# EAGLE board rj12_adapter (EAGLE 8.5.0)
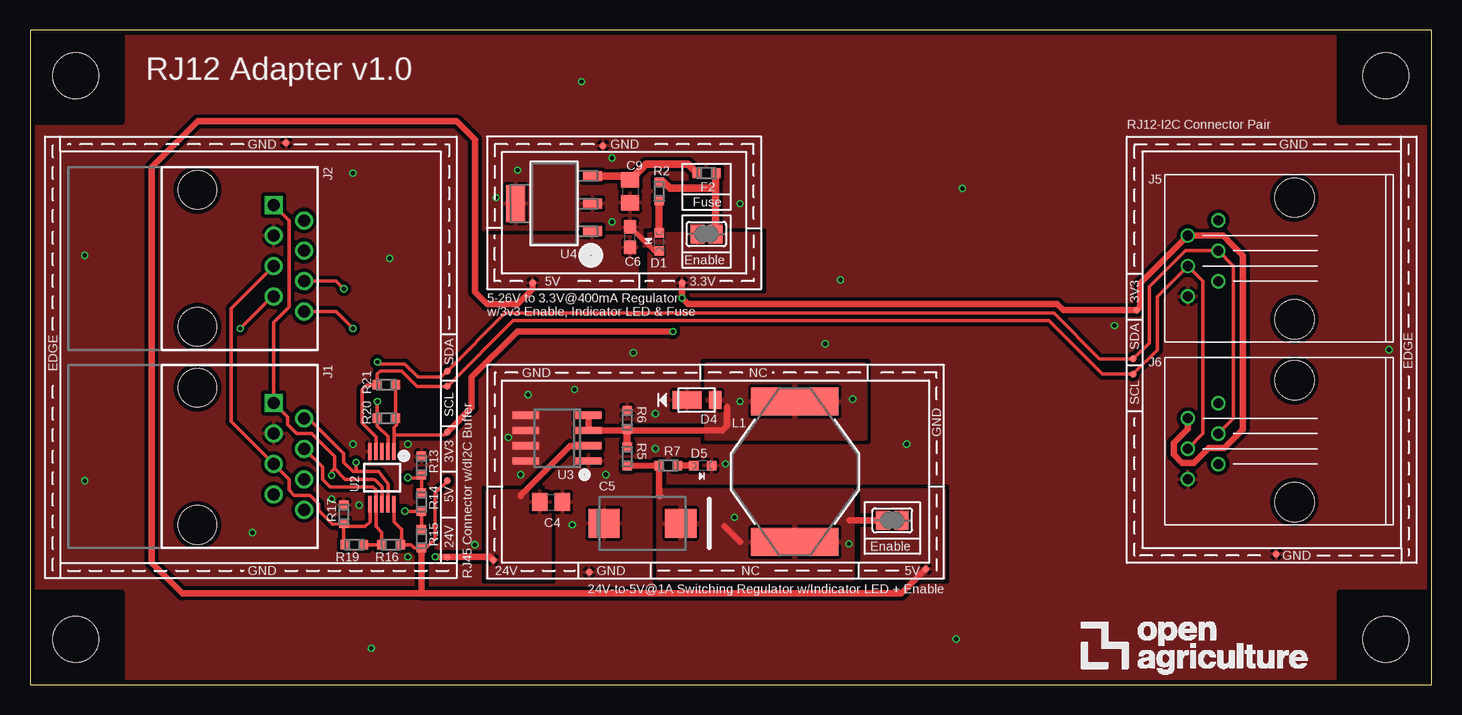
[diagram p0: board, top side]
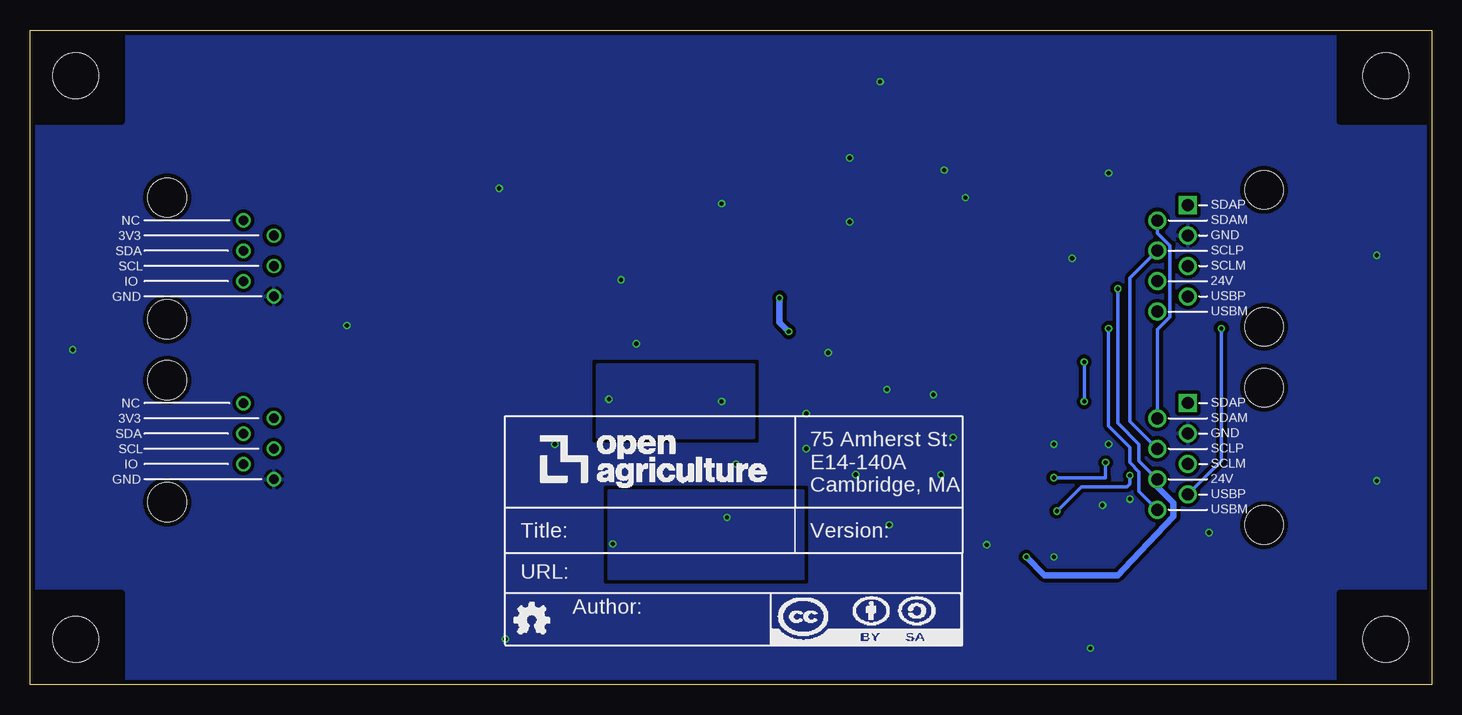
[diagram p1: board, bottom side, seen from below]

Size 116.84 x 54.61 mm. Coordinates in mm from the lower left corner, seen from the top.
Outline: 0,0 116.84,0 116.84,54.61 0,54.61 0,0
Copper layers (1*16): Top 0.035559375mm / dielectric 1.6mm / Bottom 0.035559375mm
Design rules "oshpark-2layer-mask": minimum track width 6mil, minimum drill 10mil, track to track 6mil, track to pad 6mil, pad to pad 6mil, via to via 6mil, smd to smd 6mil, copper to edge 15mil, drill to drill 6mil, minimum pad ring 5mil, minimum via ring 5mil, stop-mask expansion 2.5mil, vias tented up to drill 20mil, thermal gap 10mil

## Footprints (pad centres in the part's own frame; a part is rotated, then mirrored left to right if it is on the bottom)
C0805 = smd 1.3 x 1.5: 1 -0.95,0; 2 0.95,0
CT7343 = smd 2.6 x 2.4: + -3.2,0; - 3.2,0
C0603 = smd 1.1 x 1: 1 -0.85,0; 2 0.85,0
CHIPLED_0603 = smd 0.8 x 0.8: A 0,-0.75; C 0,0.75
POWERDI123 = smd 1.05 x 1.5: + -1.3,0 | smd 2.4 x 1.5: - 1.05,0
0603 = smd 0.756 x 0.8: 1 -0.778,0; 2 0.778,0
OPENAG-V1-RJ45 = drill 1: 24V(6) 1.905,8.89; DSCLM(5) 0.635,6.35; DSCLP(4) -0.635,8.89; DSDAM(2) -3.175,8.89; GND(3) -1.905,6.35; USBM(8) 4.445,8.89; USBP(7) 3.175,6.35 | drill 1 square: DSDAP(1) -4.445,6.35 | hole 3.2: -5.715,0; 5.715,0
OPENAG-I2C-RJ12 = drill 0.8: 1 -8.89,-3.175; 2 -6.35,-1.905; 3 -8.89,-0.635; 4 -6.35,0.635; 5 -8.89,1.905; 6 -6.35,3.175 | hole 3.25: 0,-5.08; 0,5.08
UP2B = smd 2.311 x 7.29: 1 -5.855,0; 2 5.855,0
RC0603N = smd 0.756 x 0.8: 1 -0.778,0; 2 0.778,0
SOLDERJUMPER_REFLOW_NOPASTE = smd 1.168 x 1.6: 1 -0.762,0; 2 0.762,0
TP06R = smd 0.6 x 0.6: TP 0,0
SOP50P490X110-10N = smd 1.4 x 0.3: 1 -2.2,1; 2 -2.2,0.5; 3 -2.2,0; 4 -2.2,-0.5; 5 -2.2,-1; 6 2.2,-1; 7 2.2,-0.5; 8 2.2,0; 9 2.2,0.5; 10 2.2,1
SOIC8 = smd 0.6 x 2.2: 1 -1.905,-2.6; 2 -0.635,-2.6; 3 0.635,-2.6; 4 1.905,-2.6; 5 1.905,2.6; 6 0.635,2.6; 7 -0.635,2.6; 8 -1.905,2.6
MP04A = smd 1.6 x 0.838: 1 -3.2,2.3; 2 -3.2,0; 3 -3.2,-2.3 | smd 1.6 x 3.099: 4 3.2,0
OPENAG-CORNER-MOUNTING-HOLE = hole 3.81: 0,0

## Placement (x,y rotation side)
C4  15uF  [C0805]  43.43,15.24 0 top
C5  220uF  [CT7343]  51.05,13.46 180 top
C6  0.1uF  [C0603]  50.04,37.34 90 top
C9  10uF  [C0805]  50.04,41.15 270 top
D1  APT1608  [CHIPLED_0603]  52.45,36.96 180 top
D4  SBR2A40P1-7  [POWERDI123]  55.82,23.75 180 top
D5  APT1608  [CHIPLED_0603]  56.07,18.29 270 top
F2  400mA  [0603]  56.39,42.67 0 top
FRAME1  [DOCFIELD]  77.22,3.3 0 bottom
J1  54602-908LF  [OPENAG-V1-RJ45]  13.97,19.05 270 top
J2  54602-908LF  [OPENAG-V1-RJ45]  13.97,35.56 270 top
J5  OPENAG-I2C-RJ12  [OPENAG-I2C-RJ12]  105.41,35.56 0 top
J6  OPENAG-I2C-RJ12  [OPENAG-I2C-RJ12]  105.41,20.32 0 top
L1  68uH  [UP2B]  63.75,17.78 270 top
R2  100  [RC0603N]  52.45,41.15 90 top
R5  3.01K  [RC0603N]  49.78,19.05 270 top
R6  976 Ohm  [RC0603N]  49.78,22.1 270 top
R7  100  [RC0603N]  53.21,18.29 180 top
R13  600  [RC0603N]  32.64,18.29 90 top
R14  120  [RC0603N]  32.64,15.24 90 top
R15  600  [RC0603N]  32.64,12.19 90 top
R16  600  [RC0603N]  30.1,11.68 0 top
R17  600  [RC0603N]  26.16,14.22 270 top
R19  120  [RC0603N]  27.05,11.68 0 top
R20  10K  [RC0603N]  29.72,22.23 0 top
R21  10K  [RC0603N]  29.72,25.02 0 top
SJ2  [SOLDERJUMPER_REFLOW_NOPASTE]  71.88,13.72 0 top
SJ3  [SOLDERJUMPER_REFLOW_NOPASTE]  56.39,37.59 180 top
TP4  TPTP06R  [TP06R]  47.75,44.96 180 top
TP5  TPTP06R  [TP06R]  74.68,9.65 180 top
TP6  TPTP06R  [TP06R]  46.61,9.4 180 top
TP7  TPTP06R  [TP06R]  38.61,10.41 180 top
TP8  TPTP06R  [TP06R]  34.8,24.89 0 top
TP9  TPTP06R  [TP06R]  34.8,26.16 0 top
TP11  TPTP06R  [TP06R]  92.27,31.24 0 top
TP12  TPTP06R  [TP06R]  91.95,25.91 0 top
TP13  TPTP06R  [TP06R]  103.89,10.92 0 top
TP14  TPTP06R  [TP06R]  91.95,27.18 0 top
TP29  TPTP06R  [TP06R]  41.91,33.53 180 top
TP30  TPTP06R  [TP06R]  54.36,33.53 180 top
TP32  TPTP06R  [TP06R]  34.8,21.08 0 top
TP33  TPTP06R  [TP06R]  21.34,45.21 0 top
TP34  TPTP06R  [TP06R]  34.8,17.02 0 top
TP35  TPTP06R  [TP06R]  34.8,10.67 0 top
U2  PCA9615  [SOP50P490X110-10N]  29.34,17.27 270 top
U3  MIC4680  [SOIC8]  43.94,20.57 90 top
U4  LM2937  [MP04A]  43.69,40.13 180 top
U$1  [OPENAG-CORNER-MOUNTING-HOLE]  3.81,3.81 0 top
U$2  [OPENAG-CORNER-MOUNTING-HOLE]  3.81,50.8 270 top
U$3  [OPENAG-CORNER-MOUNTING-HOLE]  113.03,3.81 90 top
U$4  [OPENAG-CORNER-MOUNTING-HOLE]  113.03,50.8 180 top
U$5  [OPENAG-LOGO-750-MIL]  87.63,1.27 0 top

## Library data of the parts
C4 = openag-capacitors; MANUFACTURER: TDK Corporation; MPN: C2012X5R1V156M125AC; VENDOR: Digikey; VLINK: https://www.digikey.com/product-detail/en/tdk-corporation/C2012X5R1V156M125AC/445-14423-1-ND/3956089; VPN: 445-14423-1-ND
C5 = openag-capacitors; MANUFACTURER: AVX Corporation; MPN: TPSY227K010R0100; VENDOR: Digikey; VLINK: https://www.digikey.com/product-detail/en/avx-corporation/TPSY227K010R0100/478-5408-1-ND/1967712; VPN: 478-5408-1-ND
C6 = openag-capacitors; MANUFACTURER: Kemet; MPN: C0603C104K5RACTU; VENDOR: Digikey; VLINK: https://www.digikey.com/product-detail/en/kemet/C0603C104K5RACTU/399-5089-1-ND/1465623; VPN: 399-5089-1-ND
C9 = openag-capacitors; MANUFACTURER: Taiyo Yuden; MPN: GMK212BBJ106KG-T; VENDOR: Digikey; VLINK: https://www.digikey.com/product-detail/en/taiyo-yuden/GMK212BBJ106KG-T/587-4893-1-ND/6563736; VPN: 587-4893-1-ND
D1 D5 = openag-diodes; MANUFACTURER: Kingbright; MPN: APT1608CGCK; VENDOR: Digikey; VLINK: https://www.digikey.com/product-detail/en/kingbright/APT1608CGCK/754-1116-1-ND/1747833#; VPN: 754-1116-1-ND
D4 = openag-diodes; MANUFACTURER: Diodes Incorporated; MPN: SBR2A40P1-7; VENDOR: Digikey; VLINK: https://www.digikey.com/product-detail/en/diodes-incorporated/SBR2A40P1-7/SBR2A40P1DITR-ND/1681825; VPN: SBR2A40P1DITR-ND
F2 = openag-fuses; MANUFACTURER: Littlefuse Inc.; MPN: 0448.400MR; VENDOR: Digikey; VLINK: https://www.digikey.com/product-detail/en/littelfuse-inc/0448.400MR/F5573CT-ND/3306934; VPN: F5573CT-ND
FRAME1 = openag-frames; AUTHOR: JR; MPN: N/A; TITLE: RJ12 Adapter; URL: github.com/OpenAgInitiative/openag_eagle/proj/sensor-nodes; VER: 1.0
J1 J2 = openag_connector; POPULATE: YES; VERIFIED: NO
J5 J6 = openag-connectors; MPN: A-2004-1-4-LP-N-R
L1 = openag-inductors; MANUFACTURER: Eaton; MPN: UP2B-680-R; VENDOR: Digikey; VLINK: https://www.digikey.com/product-detail/en/UP2B-680-R/513-1083-1-ND/695364; VPN: 513-1083-1-ND
R2 R7 = openag-resistors; MANUFACTURER: Yageo; MPN: RC0603JR-07100RL; VENDOR: Digikey; VLINK: https://www.digikey.com/product-detail/en/yageo/RC0603JR-07100RL/311-100GRCT-ND/729644; VPN: 311-100GRCT-ND
R5 = openag-resistors; MANUFACTURER: Yageo; MPN: RC0603FR-073K01L; VENDOR: Digikey; VLINK: https://www.digikey.com/product-detail/en/yageo/RC0603FR-073K01L/311-3.01KHRCT-ND/730068; VPN: 311-3.01KHRCT-ND
R6 = openag-resistors; MANUFACTURER: Yageo; MPN: RC0603FR-07976RL; VENDOR: Digikey; VLINK: https://www.digikey.com/product-detail/en/yageo/RC0603FR-07976RL/311-976HRCT-ND/730388; VPN: 311-976HRCT-ND
R13 R15-R17 = openag-resistors; MANUFACTURER: Yageo; MPN: RC0603FR-07604RL; VENDOR: Digikey; VLINK: https://www.digikey.com/product-detail/en/yageo/RC0603FR-07604RL/311-604HRCT-ND/730276; VPN: 311-604HRCT-ND
R14 R19 = openag-resistors; MANUFACTURER: Yageo; MPN: RC0603FR-07120RL; VENDOR: Digikey; VLINK: https://www.digikey.com/product-detail/en/yageo/RC0603FR-07120RL/311-120HRCT-ND/729867; VPN: 311-120HRCT-ND
R20 R21 = openag-resistors; MANUFACTURER: Panasonic; MPN: ERJ-3EKF1002V; VENDOR: Digikey; VLINK: https://www.digikey.com/product-detail/en/panasonic-electronic-components/ERJ-3EKF1002V/P10.0KHCT-ND/198102; VPN: P10.0KHCT-ND
SJ2 SJ3 = openag-connectors; MPN: N/A
TP4-TP9 TP11-TP14 TP29 TP30 TP32-TP35 = openag-testpads; MPN: N/A
U2 = openag-buffers; MANUFACTURER: NXP USA Inc.; MPN: PCA9615DPJ; VENDOR: Digikey; VLINK: https://www.digikey.com/product-detail/en/nxp-usa-inc/PCA9615DPJ/568-11484-1-ND/4864508; VPN: 568-11484-1-ND
U3 = openag-regulators; MANUFACTURER: Microchip Technology; MPN: MIC4680YM-TR; VENDOR: Digikey; VLINK: https://www.digikey.com/product-detail/en/microchip-technology/MIC4680YM-TR/576-1222-1-ND/771874; VPN: 576-1222-1-ND
U4 = openag-regulators; MANUFACTURER: Texas Instruments; MPN: LM2937IMP-3.3/NOPB; VLINK: https://www.digikey.com/product-detail/en/texas-instruments/LM2937IMP-3.3-NOPB/LM2937IMP-3.3-NOPBCT-ND/270742#; VPN: LM2937IMP-3.3/NOPBCT-ND
U$1-U$5 = openag-frames

## Nets
+3V3: J5.5 J6.5 R20.2 R21.2 SJ3.2 TP11.TP TP30.TP TP32.TP U2.1
+5V: C6.1 R15.1 R16.2 SJ2.2 TP5.TP TP29.TP TP34.TP U2.10 U4.1
+24V: C4.1 J1.24V(6) J2.24V(6) TP7.TP TP35.TP U3.2
DSCLM: J1.DSCLM(5) J2.DSCLM(5) R17.2 R19.1 U2.6
DSCLP: J1.DSCLP(4) J2.DSCLP(4) R16.1 R19.2 U2.7
DSDAM: J1.DSDAM(2) J2.DSDAM(2) R13.1 R14.2 U2.9
DSDAP: J1.DSDAP(1) J2.DSDAP(1) R14.1 R15.2 U2.8
GND: C4.2 C5.- C6.2 C9.2 D1.C D4.- D5.C J1.GND(3) J2.GND(3) J5.1 J6.1 R6.1 R13.2 R17.1 TP4.TP TP6.TP TP13.TP TP33.TP U2.5 U3.1 U3.5 U3.6 U3.7 U3.8 U4.2 U4.4
IO: J6.2
N$4: D1.A R2.1
N$5: C9.1 F2.1 U4.3
N$31: D4.+ L1.1 R5.1 R6.2 U3.3 U3.4
N$32: D5.A R7.1
N$33: C5.+ L1.2 R5.2 R7.2 SJ2.1
REG_3V3_400MA: F2.2 R2.2 SJ3.1
SCL: J5.3 J6.3 R21.1 TP8.TP TP12.TP U2.4
SDA: J5.4 J6.4 R20.1 TP9.TP TP14.TP U2.2
USBM: J1.USBM(8) J2.USBM(8)
USBP: J1.USBP(7) J2.USBP(7)

## Tracks (layer width: path | path; a pad name or v marks a point on that pad's centre or on a via)
+3V3  (via drill 0.35)
  Top 0.305: U2.1 30.34,20.83 | 30.34,20.83 30.34,21.45 30.57,21.68 30.57,22.15 R20.2 R21.2 | TP32.TP 34.54,20.83 30.34,20.83
  Top 0.559: TP32.TP 36.83,23.11 36.83,25.65 40.64,29.46 v53.59,29.46 | TP30.TP v54.36,32.26 54.86,31.75 85.62,31.75 86.13,31.24 TP11.TP 92.56,31.53 92.56,33.5 J5.5 99.47,37.47 100.24,36.69 100.24,36.66 101.09,35.81 101.09,21.31 99.55,19.77 98.28,19.77 97.01,18.5 96.03,18.5 95.34,19.19 95.34,20.18 96.52,21.36 J6.5
  Bottom 0.559: v54.36,32.26 54.36,30.23 v53.59,29.46
  pour Top: 51.56,33.02 51.56,37.72 60.96,37.72 60.96,33.02
+5V
  Top 0.305: U2.10 30.34,13.61 30.99,12.95 30.99,11.72 R16.2 31.75,11.68 32.02,11.41 R15.1 33,11.41 33.78,12.19 33.78,16 TP34.TP
  Top 0.559: 32.77,7.62 12.7,7.62 10.16,10.16 10.16,43.18 13.97,46.99 35.56,46.99 37.08,45.47 37.08,32.77 38.1,31.75 40.64,31.75 41.91,33.02 TP29.TP | R15.1 32.64,7.75 32.77,7.62 | TP5.TP 72.64,7.62 32.77,7.62
  pour Top: 50.67,33.02 50.67,37.47 38.1,37.47 38.1,33.02
  pour Top (isolate 0.305): 76.2,16.26 69.34,16.26 69.34,8.89 76.2,8.89
+24V  (via drill 0.35)
  Top 0.305: J2.24V(6) 25.53,33.66 v26.16,33.02
  Top 0.559: v33.78,10.67 TP35.TP 38.35,10.67 TP7.TP | U3.2 45.02,19.94 40.89,15.81 40.89,15.75
  Bottom 0.305: v26.16,33.02 26.16,21.84 24.38,20.07 24.38,18.67 J1.24V(6) 22.86,16.49
  Bottom 0.559: 22.86,16.49 21.53,15.16 21.53,14.03 25.65,9.65 26.16,9.14 32.26,9.14 v33.78,10.67
  pour Top: 38.1,8.89 43.37,8.89 43.37,16.19 38.1,16.19
DSCLM
  Top 0.305: R19.1 26.16,11.72 26.16,13.21 | 26.16,13.21 R17.2 25.23,13.37 24.07,14.54 24.07,15.11 23.36,15.81 22.03,15.81 21.59,16.26 21.59,17.14 J1.DSCLM(5) 16.76,21.97 16.76,31.37 J2.DSCLM(5) | U2.6 28.34,13.61 27.94,13.21 26.16,13.21
DSCLP
  Top 0.305: R19.2 R16.1 29.32,12.72 28.84,13.21 U2.7 28.84,16.25 28.57,16.51 25.02,16.51 24.38,17.14 24.38,18.16 J1.DSCLP(4)
  Bottom 0.305: J2.DSCLP(4) 25.15,33.91 25.15,21.97 J1.DSCLP(4)
DSDAM  (via drill 0.35)
  Top 0.305: 27.18,17.78 29.08,17.78 29.84,16.76 U2.9 | R14.2 R13.1 arc-90 32.47,17.27 v31.5,17.27 31.37,17.27 | v27.18,18.54 27.18,17.78 | 27.18,17.78 26.92,17.78 26.16,18.54 26.16,19.3 23.24,22.23 J1.DSDAM(2)
  Bottom 0.305: v31.5,17.27 27.18,17.27 v27.18,18.54 | J2.DSDAM(2) 22.86,37.69 21.8,36.63 21.8,30.68 22.86,29.62 J1.DSDAM(2)
DSDAP  (via drill 0.35)
  Top 0.305: R15.2 R14.1 31.26,14.46 v31.24,14.48 | 25.4,18.03 26.29,17.14 28.57,17.14 28.75,17.09 29.34,16.51 U2.8 | 25.4,18.03 25.4,19.05 23.5,20.95 22.23,20.95 21.46,21.72 21.46,22.35 J1.DSDAP(1) 20.32,30.23 21.59,31.5 21.59,38.73 J2.DSDAP(1) | 25.4,18.03 25.14,17.78 v25.14,17.46
  Bottom 0.305: v31.24,14.48 29.21,16.51 25.4,16.51 25.14,16.77 v25.14,17.46
GND  (via drill 0.35)
  Top 0.406: D1.C 52.02,36.21 C6.2
  other vias: 26.92,20.07 31.5,20.07 27.43,14.99 25.15,15.49 48.51,38.61 48.01,17.53 40.89,17.53 57.98,18.41 52.13,22.61 41.53,24.19 39.88,20.64 45.4,24.64 73.09,20.07 45.21,13.34 40.64,42.93 38.86,40.64 29.97,35.56 45.97,50.29 77.22,3.81 28.45,3.05 4.57,17.02 4.57,35.81 50.29,27.69 48.51,43.94 59.18,40.13 67.56,33.78 77.72,41.4 26.92,42.67 66.29,28.45 18.54,12.7 31.5,10.67 37.08,11.68 52.13,19.68 113.28,27.94 90.42,29.97
  pour Top (isolate 0.406, rank 3): 60.96,33.02 60.96,45.72 38.1,45.72 38.1,33.02
  pour Top (isolate 0.305, rank 3): 0,0 116.84,0 116.84,54.61 0,54.61
  pour Top (isolate 0.305): 1.27,8.89 35.56,8.89 35.56,45.72 1.27,45.72
  pour Bottom (isolate 0.305): 35.56,8.89 35.56,45.72 1.27,45.72 1.27,8.89
  pour Bottom (isolate 0.305, rank 3): 0,0 116.84,0 116.84,54.61 0,54.61
  pour Top (isolate 0.406, rank 2): 76.2,26.67 38.1,26.67 38.1,8.89 76.2,8.89
  pour Bottom (isolate 0.406, rank 2): 76.2,26.67 38.1,26.67 38.1,8.89 76.2,8.89
  pour Top (isolate 0.305, no thermals): 42.55,18.1 39.81,18.1 39.81,23.18 42.55,23.18
  pour Top (isolate 0.305): 115.57,45.72 115.57,10.16 91.44,10.16 91.44,45.72
N$4
  Top 0.61: D1.A R2.1
N$5
  Top 0.61: 49.86,42.43 C9.1 | C9.1 49.7,42.43 U4.3 | F2.1 54.85,43.43 51.37,43.43 C9.1
N$31  (via drill 0.35)
  Top 0.559: 49.67,21.21 U3.3 U3.4 | 49.67,21.21 R6.2 | 58.1,23.16 58.1,21.59 57.72,21.21 49.67,21.21
  Top 0.61: R5.1 R6.2
  other vias: 59.18,23.62 68.58,23.81
  pour Top (isolate 0.305): 69.6,20.57 69.6,26.67 56.39,26.67 56.39,20.57
  pour Bottom (isolate 0.305): 69.53,26.67 69.53,20.64 56.52,20.64 56.52,26.67
N$32
  Top 0.559: R7.1 D5.A
N$33  (via drill 0.35)
  Top 0.559: 59.2,11.93 57.91,13.21 | SJ2.1 68.33,13.72 | R5.2 R7.2 52.44,15.75 52.58,15.75
  Top 0.61: SJ2.1 71.1,13.7
  other vias: 58.74,13.97 68.26,11.75
  pour Top: 68.58,8.89 68.58,16.19 52.39,16.19 52.39,8.89
  pour Bottom (isolate 0.305): 68.58,8.89 68.58,16.19 52.39,16.19 52.39,8.89
REG_3V3_400MA
  Top 0.61: SJ3.1 57.17,41.4 | 57.17,41.4 F2.2 | R2.2 52.82,41.93 53.34,41.4 57.17,41.4
SCL
  Top 0.305: U2.4 28.84,20.69 27.69,21.84 27.69,24.64 28.07,25.02 R21.1 28.96,25.04 28.96,25.91 29.21,26.16 30.99,26.16 32.26,24.89 TP8.TP 40.28,30.38 84.94,30.38 84.96,30.35 89.41,25.91 TP12.TP 93.98,27.94 93.98,32.38 J5.3 97.79,33.66 97.79,20.95 J6.3
SDA  (via drill 0.35)
  Top 0.305: U2.2 29.84,20.71 28.94,21.61 R20.1 28.94,23.61 v28.96,23.62 | v28.96,26.92 29.11,26.77 31.24,26.77 32.36,25.65 34.29,25.65 TP9.TP 39.62,30.99 85.34,30.99 89.15,27.18 TP14.TP 93.29,28.52 93.29,33.2 96.29,36.2 J5.4 100.33,34.92 100.33,22.23 J6.4
  Bottom 0.305: v28.96,23.62 v28.96,26.92
USBM  (via drill 0.35)
  Top 0.305: v26.92,29.72 25.53,31.11 J2.USBM(8)
  Bottom 0.305: v26.92,29.72 26.92,21.59 25.15,19.81 25.15,18.54 24.38,17.77 24.38,16.13 J1.USBM(8)
USBP  (via drill 0.35)
  Top 0.305: v17.53,29.72 20.19,32.38 J2.USBP(7)
  Bottom 0.305: v17.53,29.72 17.53,18.67 J1.USBP(7)

## Text on the board
tPlace: RJ12 Adapter v1.0 | RJ12-I2C Connector Pair | GND | GND | GND | Fuse | Enable | 5V | 3.3V | 3V3 | 5-26V to 3.3V@400mA Regulator / w/3v3 Enable, Indicator LED & Fuse | SDA | SDA | EDGE | GND | NC | EDGE | GND | SCL | SCL | 3V3 | 5V | Enable | 24V | GND | 24V | GND | NC | GND | RJ45 Connector w/dI2C Buffer | 5V | 24V-to-5V@1A Switching Regulator w/Indicator LED + Enable
tValues: 100